# Altium PCB LED_CONTROLLER.PcbDoc
Units mm, origin at the board's own origin, x right, y up, seen from the top; angles counter-clockwise.
Board outline 35 x 90 mm, 2 copper layers (Top Layer, Bottom Layer), stack 1.071 mm thick; 49 components, 35 nets, 177 pads, 27 vias.
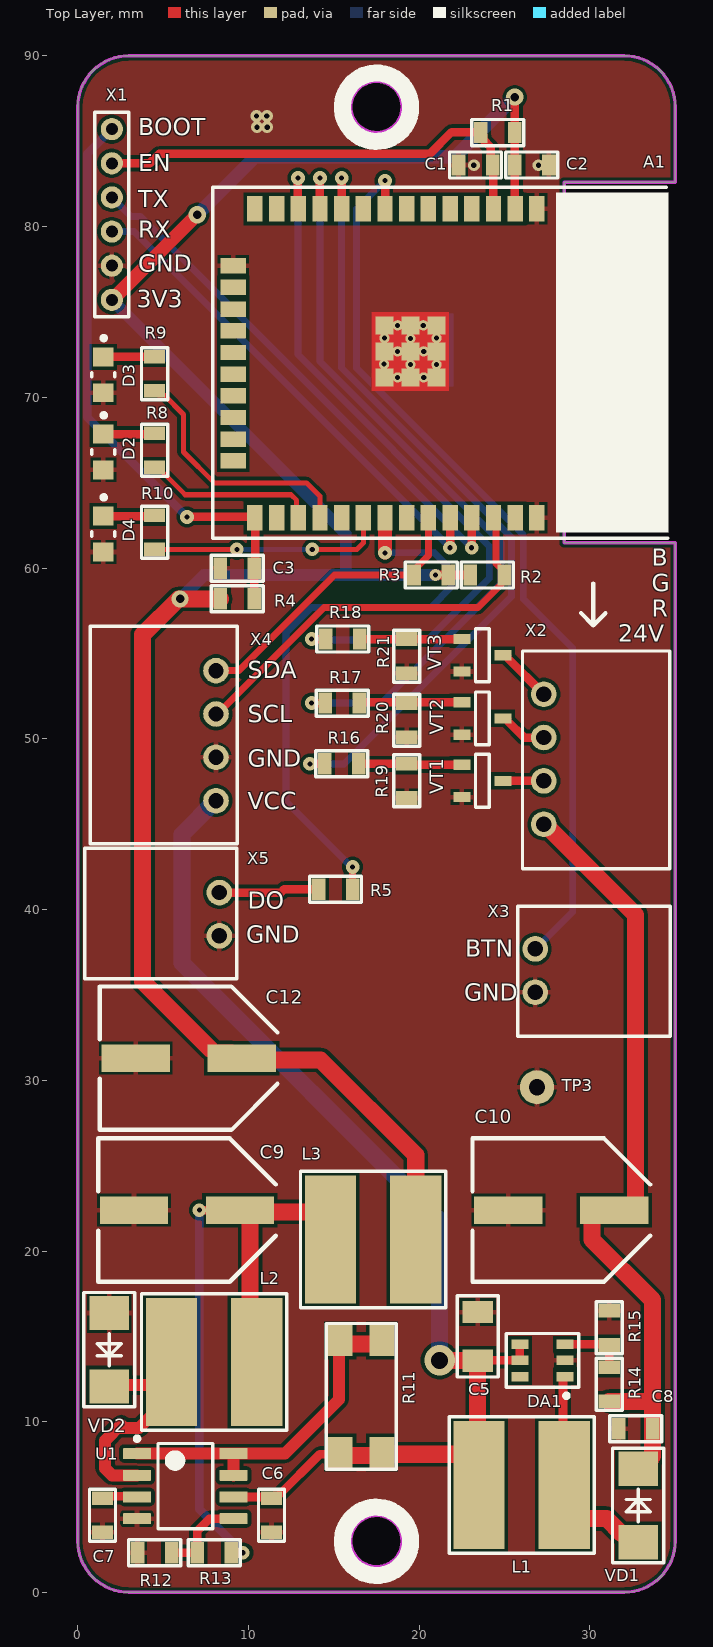
[diagram p0: Top Layer view]
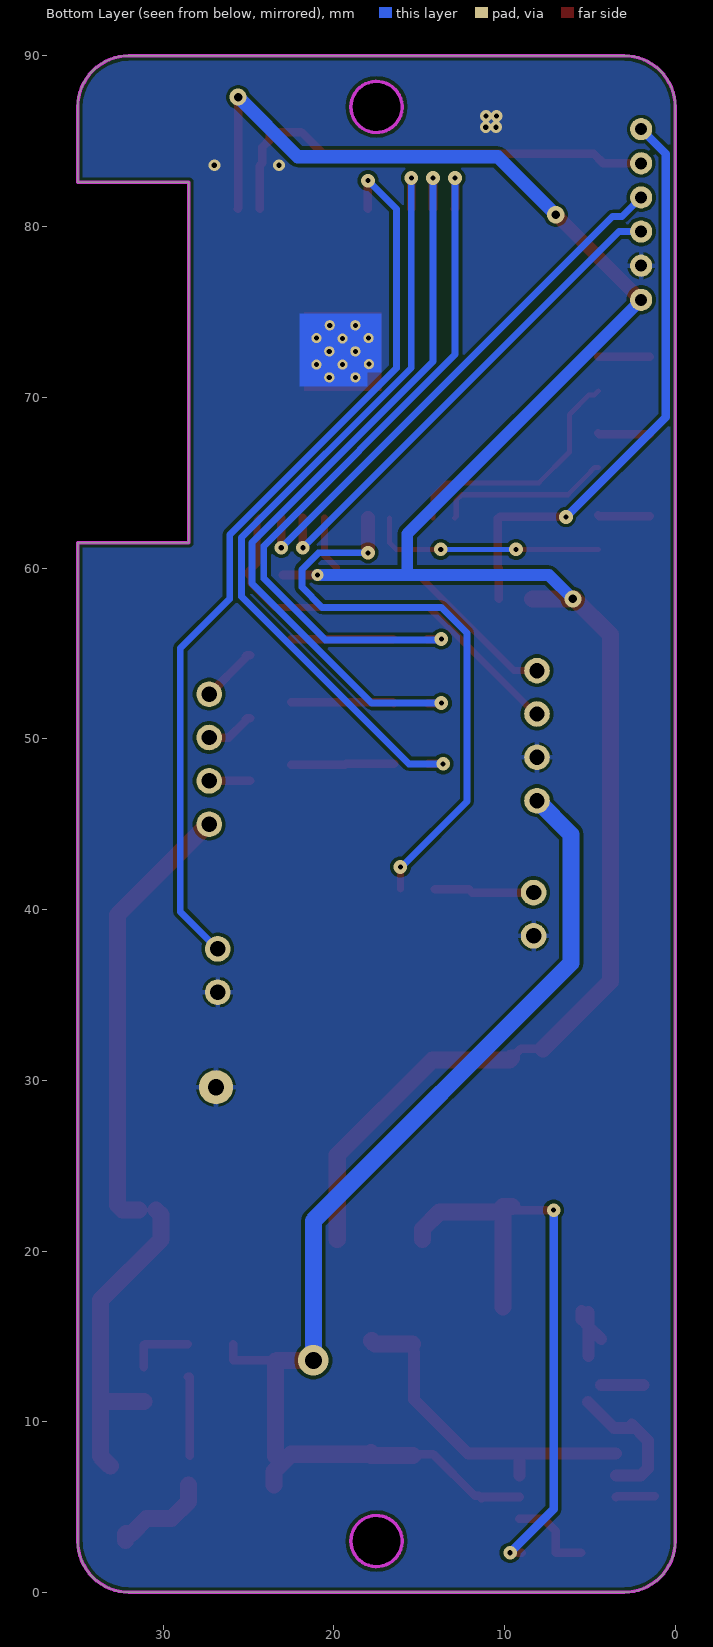
[diagram p1: Bottom Layer view, seen from below]
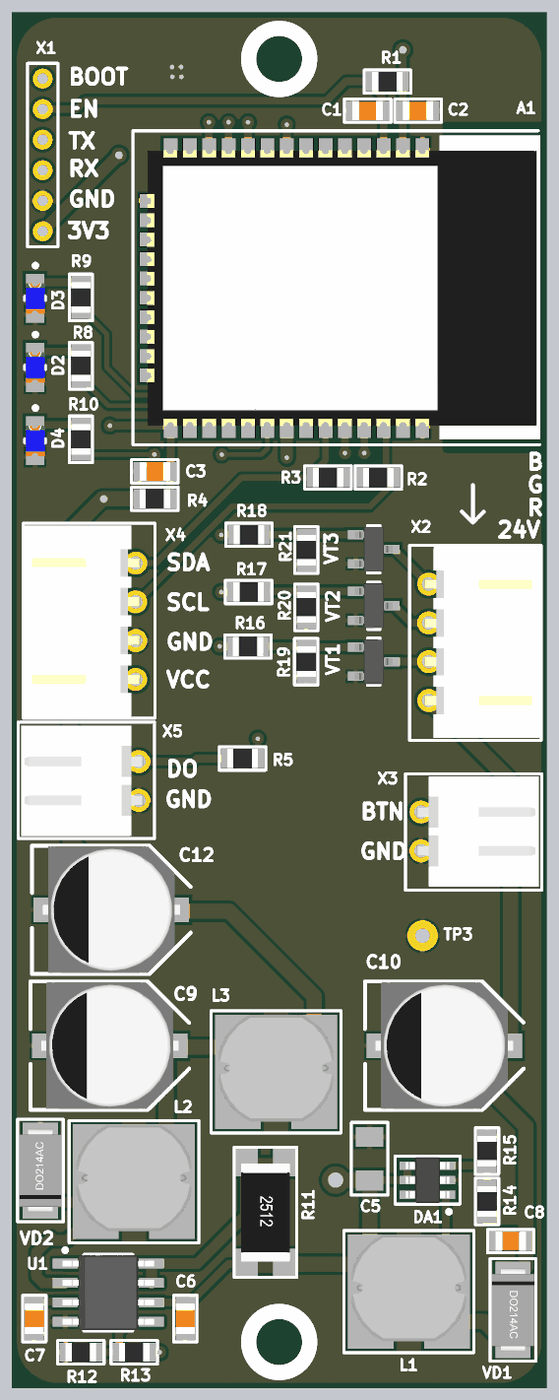
[diagram p2: 3D render of the assembled board from above, using the file's embedded part models]

## Layer stack, top to bottom
Top Solder: solder mask 0.0102, Solder Resist, Dk 3.5
Top Layer: signal copper 0.0356
Dielectric 1: dielectric 1, FR-4, Dk 4.8
Bottom Layer: signal copper 0.0356
Bottom Solder: solder mask 0.0102, Solder Resist, Dk 3.5

## Board outline
0,3.016 0,87.016 cw(c3,87.016) 3,90.016 32,90.016 cw(c32,87.016) 35,87.016 35,82.6 28.5,82.6 28.5,61.5 35,61.5 35,3.016 cw(c32,3.016) 32,0.016 3,0.016 cw(c3,3.016)
cut-out: 17.5,85.516 cw(c17.5,87.016) 16,87.016 cw(c17.5,87.016) 17.5,88.516 cw(c17.5,87.016) 19,87.016 cw(c17.5,87.016)
cut-out: 16,3.016 ccw(c17.5,3.016) 17.5,1.516 ccw(c17.5,3.016) 19,3.016 ccw(c17.5,3.016) 17.5,4.516 ccw(c17.5,3.016)

## Design rules (kind name [scope] priority, off if disabled: settings)
Clearance [All] p1: gap=0.2 ignorepadtopadclearanceinfootprint=FALSE
ComponentClearance [All] p1: gap=0.1 collisioncheckmode=3 verticalgap=0.1 showdistances=FALSE
DiffPairsRouting [All] p1: maxlimit=0.254 minlimit=0.254 mostfreqgap=0.254 substack1={A23D90DD-733B-49C5-8102-56B3D284E3A0} toplayer_{a23d90dd-733b-49c5-8102-56b3d284e3a0}_minwidth=0.381 toplayer_{a23d90dd-733b-49c5-8102-56b3d284e3a0}_maxwidth=0.381 toplayer_{a23d90dd-733b-49c5-8102-56b3d284e3a0}_prefwidth=0.381 bottomlayer_{a23d90dd-733b-49c5-8102-56b3d284e3a0}_minwidth=0.381 bottomlayer_{a23d90dd-733b-49c5-8102-56b3d284e3a0}_maxwidth=0.381 bottomlayer_{a23d90dd-733b-49c5-8102-56b3d284e3a0}_prefwidth=0.381 toplayer_minwidth=0.381 toplayer_maxwidth=0.381 toplayer_prefwidth=0.381 bottomlayer_minwidth=0.381 bottomlayer_maxwidth=0.381 bottomlayer_prefwidth=0.381 substack2={0B3DB408-A969-412D-8C07-BA8AE97219D9} toplayer_{0b3db408-a969-412d-8c07-ba8ae97219d9}_minwidth=0.381 toplayer_{0b3db408-a969-412d-8c07-ba8ae97219d9}_maxwidth=0.381 toplayer_{0b3db408-a969-412d-8c07-ba8ae97219d9}_prefwidth=0.381 bottomlayer_{0b3db408-a969-412d-8c07-ba8ae97219d9}_minwidth=0.381 bottomlayer_{0b3db408-a969-412d-8c07-ba8ae97219d9}_maxwidth=0.381 bottomlayer_{0b3db408-a969-412d-8c07-ba8ae97219d9}_prefwidth=0.381 substack3={378827E6-B38F-4565-9D2F-710D8D441C30} toplayer_{378827e6-b38f-4565-9d2f-710d8d441c30}_minwidth=0.381 toplayer_{378827e6-b38f-4565-9d2f-710d8d441c30}_maxwidth=0.381 toplayer_{378827e6-b38f-4565-9d2f-710d8d441c30}_prefwidth=0.381 bottomlayer_{378827e6-b38f-4565-9d2f-710d8d441c30}_minwidth=0.381 bottomlayer_{378827e6-b38f-4565-9d2f-710d8d441c30}_maxwidth=0.381 bottomlayer_{378827e6-b38f-4565-9d2f-710d8d441c30}_prefwidth=0.381 substack4={1E65D4A7-266F-4925-B814-5E9C4A66F8EE} toplayer_{1e65d4a7-266f-4925-b814-5e9c4a66f8ee}_minwidth=0.381 toplayer_{1e65d4a7-266f-4925-b814-5e9c4a66f8ee}_maxwidth=0.381 toplayer_{1e65d4a7-266f-4925-b814-5e9c4a66f8ee}_prefwidth=0.381 bottomlayer_{1e65d4a7-266f-4925-b814-5e9c4a66f8ee}_minwidth=0.381 bottomlayer_{1e65d4a7-266f-4925-b814-5e9c4a66f8ee}_maxwidth=0.381 bottomlayer_{1e65d4a7-266f-4925-b814-5e9c4a66f8ee}_prefwidth=0.381 substack5={93C5D03E-862D-45F8-9871-970EEA9B3F11} toplayer_{93c5d03e-862d-45f8-9871-970eea9b3f11}_minwidth=0.381 toplayer_{93c5d03e-862d-45f8-9871-970eea9b3f11}_maxwidth=0.381 toplayer_{93c5d03e-862d-45f8-9871-970eea9b3f11}_prefwidth=0.381 bottomlayer_{93c5d03e-862d-45f8-9871-970eea9b3f11}_minwidth=0.381 bottomlayer_{93c5d03e-862d-45f8-9871-970eea9b3f11}_maxwidth=0.381 bottomlayer_{93c5d03e-862d-45f8-9871-970eea9b3f11}_prefwidth=0.381 maxuncoupledlength=12.7
Height [All] p1: minheight=0 maxheight=30 prefheight=30
HoleSize [All] p1: absolutevalues=TRUE maxlimit=6 minlimit=0.01 maxpercent=80.000 minpercent=20.000
HoleToHoleClearance [All] p1: gap=0.1 allowstackedmicrovias=TRUE
MinimumSolderMaskSliver [All] p1: minsoldermaskwidth=0.1
PlaneConnect [All] p1: pad.planeconnectstyle=Relief pad.reliefexpansion=0.5 pad.reliefentries=4 pad.reliefconductorwidth=0.5 pad.reliefairgap=0.15 via.planeconnectstyle=Direct via.reliefexpansion=0.5 via.reliefentries=4 via.reliefconductorwidth=0.5 via.reliefairgap=0.15
PolygonConnect VQFN20 [HasFootprint('VQFN20')] p1: connectstyle=Direct reliefconductorwidth=0.254 reliefentries=4 polygonreliefangle="90 Angle" airgapwidth=0.254
PolygonConnect [All] p2: thpad.connectstyle=Relief thpad.reliefconductorwidth=0.3 thpad.reliefentries=4 thpad.polygonreliefangle="90 Angle" thpad.airgapwidth=0.15 smdpad.connectstyle=Relief smdpad.reliefconductorwidth=0.3 smdpad.reliefentries=4 smdpad.polygonreliefangle="90 Angle" smdpad.airgapwidth=0.15 via.connectstyle=Direct via.reliefconductorwidth=0.3 via.reliefentries=4 via.polygonreliefangle="90 Angle" via.airgapwidth=0.15
RoutingVias [All] p1: holewidth=0.1 width=0.1 viastyle="Through Hole" minholewidth=0.11 minwidth=0.1 maxholewidth=2 maxwidth=1
ShortCircuit [All] p1: allowed=TRUE
SilkToSolderMaskClearance [IsPad] p1: minsilkscreentomaskgap=0.1 clearancetoexposedcopper=TRUE
SolderMaskExpansion SolderMaskExpansion_Via [IsVia] p1: expansion=0.102 istentingtop=TRUE
SolderMaskExpansion [All] p2: expansion=0.01 istentingtop=FALSE
UnRoutedNet [All] p1: checkbadconnections=TRUE
Width [All] p1: maxlimit=5 minlimit=0.2 preferedwidth=0.3 substack1={A23D90DD-733B-49C5-8102-56B3D284E3A0} substack2={0B3DB408-A969-412D-8C07-BA8AE97219D9} substack3={378827E6-B38F-4565-9D2F-710D8D441C30} substack4={1E65D4A7-266F-4925-B814-5E9C4A66F8EE} substack5={93C5D03E-862D-45F8-9871-970EEA9B3F11}
20 further rules are at their usual default settings.

## Components (designator, comment, footprint, x,y, rotation, side; value= is the part's Value field where it differs from the comment)
A1 "MOD-ESP32-WROOM-32E" MOD-ESP32-WROOM-32E 18,72 r270 top locked
C1 "100nF" CAP-0805 23.3,83.616 r180 top
C2 "100nF" CAP-0805 26.6,83.616 r0 top
C3 "100nF" CAP-0805 9.35,60 r0 top
C5 "10uF" CAP-1206 23.425,15 r90 top
C6 "0.47uF" CAP-0805 11.35,4.532 r270 top
C7 "470pF" CAP-0805 1.453,4.532 r270 top
C8 "100nF" CAP-0805 32.675,9.6 r180 top
C9 "1000uF 6.3V" CAPPOL_SMD_SIZE_E 6.4,22.4 r180 top
C10 "100uF 35V" CAPPOL_SMD_SIZE_E 28.325,22.4 r180 top
C12 "1000uF 6.3V" CAPPOL_SMD_SIZE_E 6.5,31.3 r180 top
D2 "151031YS06000" LED_BLUE 1.5,66.805 r270 top locked
D3 "151031YS06000" LED_BLUE 1.5,71.325 r270 top locked
D4 "151031YS06000" LED_BLUE 1.5,62 r270 top locked
DA1 "MT3608" SOT23-6 27.225,13.6 r180 top
L1 "4.7uH" IND-7850 26,6.3 r0 top
L2 "220uH" IND-7850 7.986,13.5 r0 top
L3 "220uH" IND-7850 17.3,20.686 r0 top
R1 "10K" RES-0805 24.6,85.516 r180 top
R2 "10K" RES-0805 24,59.6 r0 top
R3 "10K" RES-0805 20.7,59.6 r180 top
R4 "10K" RES-0805 9.35,58.2 r180 top
R5 "1K" RES-0805 15.1,41.2 r180 top
R8 "1K" RES-0805 4.5,66.905 r90 top locked
R9 "1K" RES-0805 4.5,71.387 r90 top locked
R10 "1K" RES-0805 4.5,62.098 r90 top locked
R11 "0.33" RES-2512 16.6,11.482 r270 top
R12 "11K" RES-0805 4.5,2.332 r180 top
R13 "18K" RES-0805 8,2.332 r180 top
R14 "180K" RES-0805 31.125,12.2 r270 top
R15 "10K" RES-0805 31.125,15.5 r270 top
R16 "1K" RES-0805 15.46,48.54 r180 top
R17 "1K" RES-0805 15.5,52.1 r180 top
R18 "1K" RES-0805 15.52,55.85 r180 top
R19 "10K" RES-0805 19.27,47.54 r90 top
R20 "10K" RES-0805 19.278,51.1 r90 top
R21 "10K" RES-0805 19.278,54.85 r90 top
TP3 "Test_Point_PCB" Test_Point 26.9,29.6 r0 top
U1 "MC34063" SOIC-8_M 6.3,6.232 r0 top
VD1 "DIODE" "DO-214AC, SMA" 32.825,5.1 r270 top
VD2 "DIODE" "DO-214AC, SMA" 1.85,14.225 r90 top
VT1 "AO3404" SOT23-3 23.7,47.54 r0 top
VT2 "AO3404" SOT23-3 23.7,51.2 r0 top
VT3 "AO3404" SOT23-3 23.7,54.9 r0 top
X1 "CONN-6-PIN" CONN-PLS-6-2.00mm 2,75.716 r90 top locked
X2 "CONN-4-PIN" CONN-PLS-4-2.54mm 27.3,45 r90 top locked
X3 "CONN-2-PIN" XH2 26.8,37.7 r270 top locked
X4 "CONN-4-PIN" CONN-PLS-4-2.54mm 8.1,54 r270 top locked
X5 "CONN-2-PIN" XH2 8.3,38.46 r90 top

## Footprints (in the part's own frame and the unit in brackets; to place one, negate y for a bottom-side part, rotate by r counter-clockwise, add the part's x,y. Pads: shape width x height; smd on the part's side, far side on the other; paste and mask are expansions set on the pad)
CAP-0805 [mm]
  rect 0.8x1.25 smd mask+0.015: 1(-1,0) 2(1,0)
  silkscreen extent -1.52,-0.76 1.52,0.76, body extent -1,-0.62 1,0.63, height 0.8
CAP-1206 [mm]
  rect 1.3x1.8 smd: 1(-1.425,0) 2(1.425,0)
  silkscreen extent -2.37,-1.2 2.37,1.2, body extent -1.68,-0.87 1.67,0.87, height 0.95
CAPPOL_SMD_SIZE_E [mm]
  rect 4x1.6 smd: 1(-3.1,0) 2(3.1,0)
  silkscreen extent -5.2,-4.2 5.2,4.2, body extent -4.5,-4.15 4.5,4.15, height 6.2
CONN-PLS-4-2.54mm [mm]
  round 1.5 hole 0.9: 1(0,0) 2(2.54,0) 3(5.08,0) 4(7.62,0)
  silkscreen extent -2.6,-7.37 10.15,1.25, body extent -2.45,-7.3 10.05,0.3, height 5.9
CONN-PLS-6-2.00mm [mm]
  round 1.3 hole 0.7: 1(0,0) 2(2,0) 3(4,0) 4(6,0) 5(8,0) 6(10,0)
  silkscreen extent -1,-1 11,1
"DO-214AC, SMA" [mm]
  rect 2x2.3 smd: 1(-2.15,0) 2(2.15,0)
  silkscreen extent -3.35,-1.5 3.35,1.5, body extent -2.74,-1.4 2.74,1.4, height 2.24
IND-7850 [mm]
  rect 3x7.5 smd: 1(-2.5,0) 2(2.5,0)
  silkscreen extent -4.25,-4 4.25,4, body extent -3.81,-3.25 3.81,3.75, height 4.9
LED_BLUE [mm]
  rect 1.1x1.2 smd paste+0 mask+0: 1(-1.05,0) 2(1.05,0)
  silkscreen extent -2.27,-0.67 0.13,0.67, body extent -1,-0.63 1,0.63, height 0.8
MOD-ESP32-WROOM-32E [mm]
  rect 1.5x0.9 smd paste+0 mask+0.05: 1(-9.05,8.89) 2(-9.05,7.62) 3(-9.05,6.35) 4(-9.05,5.08) 5(-9.05,3.81) 6(-9.05,2.54) 7(-9.05,1.27) 8(-9.05,0) 9(-9.05,-1.27) 10(-9.05,-2.54) 11(-9.05,-3.81) 12(-9.05,-5.08) 13(-9.05,-6.35) 14(-9.05,-7.62) 25(9.05,-7.62) 26(9.05,-6.35) 27(9.05,-5.08) 28(9.05,-3.81) 29(9.05,-2.54) 30(9.05,-1.27) 31(9.05,0) 32(9.05,1.27) 33(9.05,2.54) 34(9.05,3.81) 35(9.05,5.08) 36(9.05,6.35) 37(9.05,7.62) 38(9.05,8.89)
  rect 0.9x1.5 smd paste+0 mask+0.05: 15(-5.715,-8.89) 16(-4.445,-8.89) 17(-3.175,-8.89) 18(-1.905,-8.89) 19(-0.635,-8.89) 20(0.635,-8.89) 21(1.905,-8.89) 22(3.175,-8.89) 23(4.445,-8.89) 24(5.715,-8.89)
  rect 1.05x1.05 smd paste+0 mask+0.05: 39(-2.225,3.015) 39(-2.225,1.49) 39(-2.225,-0.035) 39(-0.7,3.015) 39(-0.7,1.49) 39(-0.7,-0.035) 39(0.825,3.015) 39(0.825,1.49) 39(0.825,-0.035)
  round 0.6 hole 0.3: 39(-2.225,2.24) 39(-2.225,0.74) 39(-1.475,3.015) 39(-1.475,-0.035) 39(-1.45,1.49) 39(-0.7,2.265) 39(-0.7,0.74) 39(0.05,-0.06) 39(0.075,3.015) 39(0.075,1.49) 39(0.825,2.265) 39(0.825,0.74)
  silkscreen extent -10.3,-10.08 10.25,16.62, body extent -9.04,-9.16 9.04,16.38, height 3
RES-0805 [mm]
  rect 0.8x1.25 smd mask+0.015: 1(-1,0) 2(1,0)
  silkscreen extent -1.52,-0.76 1.52,0.76, body extent -1,-0.62 1,0.63, height 0.6
RES-2512 [mm]
  rect 1.8x1.45 smd: 1(-3.275,-1.225) 1(-3.275,1.225) 2(3.275,-1.225) 2(3.275,1.225)
  silkscreen extent -4.28,-2.05 4.25,2.05, body extent -3.2,-1.6 3.2,1.6, height 0.6
SOIC-8_M [mm]
  rrect15% 1.65x0.65 smd: 1(-2.825,1.905) 2(-2.825,0.635) 3(-2.825,-0.635) 4(-2.825,-1.905) 5(2.825,-1.905) 6(2.825,-0.635) 7(2.825,0.635) 8(2.825,1.905)
  silkscreen extent -2.95,-2.5 1.6,2.9, body extent -3,-2.45 3,2.45, height 1.63
SOT23-3 [mm]
  rect 1x0.6 smd: 1(-1.2,0.95) 2(-1.2,-0.95) 3(1.2,0)
  silkscreen extent -0.4,-1.55 0.4,1.55, body extent -1.25,-1.46 1.23,1.46, height 1.02
SOT23-6 [mm]
  rect 1x0.55 smd: 1(-1.325,0.95) 2(-1.325,0) 3(-1.325,-0.95) 4(1.325,-0.95) 5(1.325,0) 6(1.325,0.95)
  silkscreen extent -2.12,-1.58 2.12,2.2, body extent -1.42,-1.5 1.43,1.5, height 1
Test_Point [mm]
  round 2 hole 0.95: 1(0,0)
XH2 [mm]
  round 1.5 hole 0.9: 1(0,0) 2(2.54,0)
  silkscreen extent -2.5,-1.02 5.13,7.9, body extent -2.33,-0.33 4.88,7.71, height 5.84

## Part data
C1 C2 C3 C5 C6 C7 C8: library part CAP-NON-POLAR
C9 C10 C12: library part CAP-POLAR
D2 D3 D4: library part LED, "WURTH ELEKTRONIK - 151031YS06000 - LED, Yellow, Through Hole, T-1 (3mm), 30 mA, 2 V, 590 nm", Manufacturer_Name="Wurth Elektronik", Mouser Part Number=710-151031YS06000, Datasheet Link=https://katalog.we-online.de/led/datasheet/151031YS06000.pdf, Geometry.Height=5.5mm, Manufacturer_Part_Number=151031YS06000, Mouser Price/Stock=https://www.mouser.co.uk/ProductDetail/Wurth-Elektronik/151031YS06000?qs=LlUlMxKIyB3xSYYW%252BcuBiQ%3D%3D
L1 L2 L3: library part IND-CONST
R1 R2 R3 R4 R5 R8 R9 R10 R11 R12 R13 R14 R15 R16 R17 R18 R19 R20 R21: library part RES-CONST
TP3: library part TP_PCB?, "Test_Point"
VT1 VT2 VT3: library part MOSFET-N-GDS

## Via types
v1: diameter 0.8, hole 0.3, Top Layer to Bottom Layer, tented both sides, 16 vias
v2: diameter 0.7, hole 0.3, Top Layer to Bottom Layer, tented both sides, 7 vias
v3: diameter 1, hole 0.5, Top Layer to Bottom Layer, tented both sides, 3 vias
v4: diameter 1.8, hole 1, Top Layer to Bottom Layer, tented both sides, 1 vias

## Nets (pads, with @x,y where several pads share a name; then routed paths per layer and width w, separated by ;. In a path a pad name is that pad's centre, name@x,y a point inside that pad or via, vN(x,y) a via of type N, cw(c..) or ccw(c..) an arc to the next point about the centre after c; other vN are vias at no path point)
3V3: A1.2 C2.1 C12.1 L3.2 R1.1 R2.1 R3.1 R4.2 X1.1 | length 125.2
  Top Layer w0.5: C12.1@7.75,31.85 9.05,31.85 C12.1 ; v2(20.95,59.6) R3.1 R2.1 ; v3(25.6,87.59) R1.1 C2.1 25.6,81.07 A1.2
  Top Layer w0.8: X1.1 6.984,80.7 v3(7,80.7)
  Top Layer w1: v3@5.9,58.2 3.8,56.1 3.8,35.8 C12.1@7.75,31.85 ; v3(6,58.2) R4.2 ; C12.1 9.7,31.2 14.224,31.2 19.8,25.624 L3.2
  Bottom Layer w0.7: X1.1 15.7,62.016 15.7,59.6 ; v3(6,58.2) 7.4,59.6 15.7,59.6 ; v2(20.95,59.6) 15.7,59.6
  Bottom Layer w0.8: v3(7,80.7) 10.4,84.1 22.11,84.1 v3(25.6,87.59)
24V: C8.1 C10.1 R14.2 VD1.1 X2.1 | length 45.4
  Top Layer w1: X2.1@27.37,45 32.675,39.695 32.675,22.7 32.375,22.4 C10.1 ; C10.1@30.414,22.4 30.114,22.1 30.114,20.686 33.675,17.125 33.675,11.2 C8.1 33.675,7.986 VD1.1@33.089,7.4 ; R14.2 33.425,11.2 33.675,10.95
BLUE: VT3.3 X2.4 | length 3.4
  Top Layer w0.5: VT3.3 25.1,54.9 25.15,54.85 25.15,54.77 X2.4
BOOT: A1.25 C3.2 R4.1 X1.6 | length 34.5
  Top Layer w0.5: v1(6.4,63) 10.27,63 10.37,62.9 10.4,62.93 10.4,60.05 C3.2 R4.1
  Bottom Layer w0.5: X1.6 0.55,84.266 0.55,68.85 v1(6.4,63)
BTN: A1.8 X3.1 | length 53.5
  Top Layer w0.5: A1.8 v1(18,82.7)
  Bottom Layer w0.4: v1(18,82.7) 16.335,81.035 16.335,71.713 26.1,61.949 26.1,58.2 29,55.3 29,39.9 X3.1
DO_EXT: R5.2 X5.2 | length 5.9
  Top Layer w0.5: X5.2 11.9,41 12.1,41.2 R5.2
EN: A1.3 C1.1 R1.2 X1.5 | length 27.1
  Top Layer w0.5: X1.5 4.216,83.716 4.766,84.266 20.616,84.266 21.895,85.545 R1.2@23.571,85.545 ; R1.2 23.75,85.366 23.75,85.09 24.2,84.64 24.2,83.716 C1.1 24.35,83.566 A1.3
GND: A1.1 A1.15 A1.38 A1.39 C1.2 C2.2 C3.1 C5.2 C6.2 C7.2 C8.2 C9.2 C10.2 C12.2 D2.2 D3.2 D4.2 DA1.2 R12.2 R15.1 R19.1 R20.1 R21.1 TP3.1 U1.4 VD2.2 VT1.2 VT2.2 VT3.2 X1.2 X3.2 X4.3 X5.1
  other v2: 23.2,83.6 27,83.6 10.5,85.828 11.1,85.828 10.475,86.475 11.075,86.475
GREEN: VT2.3 X2.3 | length 2.9
  Top Layer w0.5: VT2.3 25.1,51.2 25.15,51.15 25.15,51.08 26.15,50.08 X2.3
LED_1: A1.27 R8.1 | length 10.2
  Top Layer w0.3: R8.1 4.725,65.905 4.975,65.655 4.975,65.625 6.3,64.3 12.5,64.3 12.826,63.974 12.826,63.044 A1.27
LED_2: A1.28 R9.1 | length 14.8
  Top Layer w0.3: R9.1 4.75,70.137 5.063,70.137 6.2,69 6.2,66.8 8,65 13.4,65 14.19,64.21 A1.28
LED_3: A1.30 R10.1 | length 13.9
  Top Layer w0.3: R10.1 4.502,61.1 v1(9.325,61.1) ; v1(13.74,61.1) 16.35,61.1 16.73,61.48 A1.30
  Bottom Layer w0.3: v1(9.325,61.1) v1(13.74,61.1)
LED_B: A1.12 R18.2 | length 42.6
  Top Layer w0.5: v1(12.9,82.854) 12.9,81.07 A1.12 ; v1(13.7,55.85) R18.2@14.52,55.85
  Bottom Layer w0.4: v1(12.9,82.854) 12.9,72.507 24.1,61.307 24.1,59.4 20.5,55.8 13.75,55.8 v1(13.7,55.85)
LED_G: A1.11 R17.2 | length 44.8
  Top Layer w0.5: v1(13.7,52.1) R17.2 ; A1.11 v1(14.19,82.854)
  Bottom Layer w0.4: v1(13.7,52.1) 17.8,52.1 24.8,59.1 24.8,61.502 14.19,72.112 v1(14.19,82.854)
LED_R: A1.10 R16.2 | length 47.2
  Top Layer w0.5: v1(13.6,48.54) R16.2 ; A1.10 v1(15.46,82.854)
  Bottom Layer w0.4: v1(13.6,48.54) 15.61,48.54 25.4,58.33 25.4,61.8 15.46,71.74 v1(15.46,82.854)
NetA1_31: A1.31 R5.1 | length 34.8
  Top Layer w0.4: R5.1 v1(16.1,42.5)
  Top Layer w0.8: v1(18,60.9) A1.31
  Bottom Layer w0.4: v1(16.1,42.5) 16.04,42.5 12.2,46.34 12.2,56.2 13.7,57.7 20.685,57.7 21.869,58.885 21.869,59.931 20.9,60.9 v1@18.034,60.9
NetC7_1: C7.1 U1.3 | length 2.3
  Top Layer w0.5: C7.1@1.2,5.632 3.44,5.632 U1.3
NetC9_1: C9.1 L2.2 L3.1 R13.1 | length 36.3
  Top Layer w0.5: v1(7.124,22.4) C9.1 ; R13.1 v1(9.675,2.332)
  Top Layer w1: C9.1@9.576,22.6 10.1,22.6 L2.2@10.1,16.732 ; C9.1@10.1,22.3 13.8,22.3 14.8,21.3 L3.1
  Bottom Layer w0.5: v1(7.124,22.4) 7.124,4.883 v1(9.675,2.332)
NetD2_1: D2.1 R8.2 | length 3
  Top Layer w0.5: D2.1 4.45,67.855 R8.2
NetD3_1: D3.1 R9.2 | length 3
  Top Layer w0.5: D3.1 1.512,72.387 R9.2
NetD4_1: D4.1 R10.2 | length 3
  Top Layer w0.5: D4.1 4.452,63.05 R10.2
NetDA1_1: DA1.1 L1.2 VD1.2 | length 10.6
  Top Layer w0.5: L1.2@28.425,8 28.425,12.625 28.45,12.65 DA1.1
  Top Layer w1: L1.2 28.5,5.336 29.5,4.336 30.964,4.336 31.85,3.45 32.175,3.45 32.2,3.425 VD1.2@32.2,3.05
NetDA1_3: DA1.3 R14.1 R15.2 | length 3.9
  Top Layer w0.5: DA1.3 31.075,14.55 R15.2 R14.1
NetL2_1: L2.1 U1.2 VD2.1 | length 16.9
  Top Layer w0.7: VD2.1@1.85,12.15 L2.1@4.35,12.15 ; 2.45,9.65 3.6,9.65 L2.1@5.1,11.15 ; 2.55,9.85 1.6,8.9 1.6,7.277 2.01,6.867 U1.2 ; L2.1@4.336,14.85 L2.1@5.086,15.6 ; L2.1@5.086,13.85 L2.1@5.086,15.6 ; L2.1@5.486,16.5 L2.1@5.486,16 ; L2.1@5.086,15.6 5.086,16.432 L2.1@5.086,15.6 ; L2.1@5.086,15.6 L2.1@5.486,16 ; L2.1@5.086,15.6 L2.1@5.486,16
NetR11_1: R11.1 U1.1 U1.7 U1.8 | length 19.7
  Top Layer w0.7: U1.1 U1.8 ; U1.7 U1.8 ; R11.1@15.3,14.077 15.3,11.3 12.137,8.137 U1.8
  Top Layer w1: R11.1@15.4,14.55 17.6,14.55 17.776,14.726 R11.1@17.776,14.751
NetR12_1: R12.1 R13.2 U1.5 | length 5.2
  Top Layer w0.5: R12.1 R13.2 7,3.608 7.719,4.327 U1.5
NetR16_1: R16.1 R19.2 VT1.1 | length 6.1
  Top Layer w0.5: R16.1 R19.2 19.32,48.49 VT1.1
NetR17_1: R17.1 R20.2 VT2.1 | length 6
  Top Layer w0.5: R17.1 16.55,52.15 VT2.1
NetR18_1: R18.1 R21.2 VT3.1 | length 6
  Top Layer w0.5: R18.1@16.52,55.85 R21.2 VT3.1
RED: VT1.3 X2.2 | length 2.4
  Top Layer w0.5: VT1.3 X2.2
RX0: A1.34 X1.3 | length 29.2
  Top Layer w0.5: v1(21.81,61.2) A1.34
  Bottom Layer w0.4: X1.3 3.294,79.716 v1(21.81,61.2)
SCL: A1.36 R2.2 X4.2 | length 24.1
  Top Layer w0.4: X4.2 8.185,51.46 10.935,54.21 10.935,54.217 13.369,56.65 13.375,56.65 14.425,57.7 23.45,57.7 24.85,59.1 24.85,59.45 R2.2 25,59.825 24.85,59.975 24.793,59.975 24.5,60.268 24.5,62.8 A1.36
SDA: A1.33 R3.2 X4.1 | length 17.6
  Top Layer w0.4: X4.1 9.45,54 15.05,59.6 R3.2 19.85,59.75 19.85,60.05 20.54,60.74 A1.33
TX0: A1.35 X1.4 | length 31.3
  Top Layer w0.5: v1(23.076,61.2) 23.08,61.204 A1.35
  Bottom Layer w0.4: X1.4 3.116,80.6 3.676,80.6 v1(23.076,61.2)
VCC: C5.1 C6.1 DA1.4 DA1.5 L1.1 R11.2 U1.6 X4.4 | length 67.9
  Top Layer w0.5: U1.6 C6.1@11.35,5.597 ; C6.1 11.5,5.682 11.757,5.682 14.175,8.1 15.268,8.1 R11.2@15.375,8.207 ; C5.1@23.388,13.537 C5.1 23.45,13.6 DA1.5 DA1.4
  Top Layer w1: R11.2@15.375,8.025 R11.2@17.825,8.025 ; R11.2@17.825,8.207 17.932,8.1 22.5,8.1 23.5,7.1 L1.1 ; v4(21.2,13.6) 21.213,13.587 23.338,13.587 C5.1@23.388,13.537 ; L1.1@23.425,8 C5.1
  Bottom Layer w1: X4.4@8.091,46.391 6.1,44.4 6.1,36.871 21.2,21.771 v4(21.2,13.6)
pads on no net: A1.4 A1.5 A1.6 A1.7 A1.9 A1.13 A1.14 A1.16 A1.17 A1.18 A1.19 A1.20 A1.21 A1.22 A1.23 A1.24 A1.26 A1.29 A1.32 A1.37 DA1.6

## Polygon pours and split planes (outlines as drawn)
GND on Bottom Layer "NONET_L-01_P-001" (solid, remove dead copper, pour order 0): 0,0.016 0,90.1 35.1,90.1 35.1,0
GND on Top Layer "NONET_L-01_P-001" (solid, remove dead copper, pour order 1): 0,0.016 0,90.1 35.1,90.1 35.1,0

## Keep-outs
Keep-Out Layer:
  circle w0.2: c17.5,87.016 r1.5
  circle w0.2: c17.5,3.016 r1.5
  lines w0.2: 0,3.016 ccw(c3,3.016) 3,0.016 32,0.016 ccw(c32,3.016) 35,3.016 35,61.5 28.5,61.5 28.5,82.6 35,82.6 35,87.016 ccw(c32,87.016) 32,90.016 3,90.016 ccw(c3,87.016) 0,87.016 0,3.016

## Other copper
Top Layer:
  rectangle net GND: 17.2,70.387 21.75,75
Bottom Layer:
  rectangle net GND: 18.041,70.65 22,73.687
  rectangle net GND: 17.208,71.475 22,74.924

## Silkscreen, mask and mechanical layers (free items; w line width, h text height)
Top Overlay:
  circle w1: c17.5,3 r2
  circle w1: c17.5,87 r2
  lines w0.25: 29.475,57.375 30.199,56.651 ; 30.2,59.1 30.2,56.65 30.913,57.362
  text "BOOT" at 3.554,85.354 h1
  text "EN" at 3.554,83.254 h1
  text "TX" at 3.554,81.154 h1
  text "RX" at 3.548,79.354 h1
  text "GND" at 3.548,77.354 h1
  text "3V3" at 3.455,75.287 h1
  text "B" at 33.624,60.154 h1
  text "G" at 33.624,58.654 h1
  text "R" at 33.624,57.154 h1
  text "24V" at 31.654,55.704 h1
  text "SDA" at 9.954,53.564 h1
  text "SCL" at 9.954,50.964 h1
  text "GND" at 9.954,48.364 h1
  text "VCC" at 9.954,45.884 h1
  text "DO" at 9.954,40.044 h1
  text "GND" at 9.877,38.054 h1
  text "BTN" at 22.704,37.254 h1
  text "GND" at 22.654,34.654 h1